# EAGLE board Copy of NTS Embarqué 3 (EAGLE 9.7.0)

Size 213.86 x 243.18 mm. Coordinates in mm from the lower left corner, seen from the top.
Outline: 0,0 213.86,0 213.86,243.19 0,243.19 0,0
Copper layers (1*16): Top 0.035mm / dielectric 1.5mm / Bottom 0.035mm
Design rules "default": minimum track width 6mil, minimum drill 0.35mm, track to track 6mil, track to pad 6mil, pad to pad 6mil, via to via 6mil, smd to smd 6mil, copper to edge 40mil, drill to drill 6mil, minimum pad ring 10mil, minimum via ring 8mil, stop-mask expansion 4mil, vias tented up to drill 0mil, thermal gap 10mil

## Footprints (pad centres in the part's own frame; a part is rotated, then mirrored left to right if it is on the bottom)
LEDRD254W60D565H860B_G = drill 0.981 pad 1.581: 1 -1.27,0; 2 1.27,0
7SEG-13 = drill 0.813 long: 1 -5.08,-7.62; 2 -2.54,-7.62; 3 0,-7.62; 4 2.54,-7.62; 5 5.08,-7.62; 6 5.08,7.62; 7 2.54,7.62; 8 0,7.62; 9 -2.54,7.62; 10 -5.08,7.62
1X08 = drill 1.016 long: 1 -8.89,0; 2 -6.35,0; 3 -3.81,0; 4 -1.27,0; 5 1.27,0; 6 3.81,0; 7 6.35,0; 8 8.89,0
RESAD1016W63L850D250B = drill 0.83 pad 1.43: 1 -5.08,0; 2 5.08,0
ARDUINO-UNO-R3-SHIELD = drill 1.016 pad 1.88: 3.3V 24.13,-2.54; 5V 24.13,0; A0 24.13,12.7; A1 24.13,15.24; A2 24.13,17.78; A3 24.13,20.32; A4 24.13,22.86; A5 24.13,25.4; AREF -24.13,-13.97; D2 -24.13,20.32; D3 -24.13,17.78; D4 -24.13,15.24; D5 -24.13,12.7; D6 -24.13,10.16; D7 -24.13,7.62; D8 -24.13,3.81; D9 -24.13,1.27; D10 -24.13,-1.27; D11 -24.13,-3.81; D12 -24.13,-6.35; D13 -24.13,-8.89; GND@0 24.13,2.54; GND@1 24.13,5.08; GND@2 -24.13,-11.43; IOREF 24.13,-7.62; NC 24.13,-10.16; RES 24.13,-5.08; RX -24.13,25.4; SCL -24.13,-19.05; SDA -24.13,-16.51; TX -24.13,22.86; VIN 24.13,7.62
DIP762W53P254L1969H508Q16B = drill 0.743 pad 1.343: 1 -3.81,8.89; 2 -3.81,6.35; 3 -3.81,3.81; 4 -3.81,1.27; 5 -3.81,-1.27; 6 -3.81,-3.81; 7 -3.81,-6.35; 8 -3.81,-8.89; 9 3.81,-8.89; 10 3.81,-6.35; 11 3.81,-3.81; 12 3.81,-1.27; 13 3.81,1.27; 14 3.81,3.81; 15 3.81,6.35; 16 3.81,8.89

## Placement (x,y rotation side)
D1  GREEN  [LEDRD254W60D565H860B_G]  142.37,221.51 180 top
DIGIT1  7SEG-CK  [7SEG-13]  31.88,218.97 0 top
DIGIT2  7SEG-CK  [7SEG-13]  62.36,218.97 0 top
DIGIT8  7SEG-CK  [7SEG-13]  92.84,218.97 0 top
DIGIT10  7SEG-CK  [7SEG-13]  123.32,218.97 0 top
KEYPAD1  KEYPAD-4X4  [1X08]  200.53,76.8 0 top
R1  100  [RESAD1016W63L850D250B]  31.88,234.21 90 top
R2  100  [RESAD1016W63L850D250B]  62.36,234.21 90 top
R3  220  [RESAD1016W63L850D250B]  141.1,234.21 90 top
R4  100  [RESAD1016W63L850D250B]  92.84,234.21 90 top
R5  100  [RESAD1016W63L850D250B]  123.32,234.21 90 top
U1  ARDUINO-UNO-R3-SHIELD  [ARDUINO-UNO-R3-SHIELD]  94.26,29.84 270 top
U2  CD4511_PDIP  [DIP762W53P254L1969H508Q16B]  15.4,158.47 90 top
U3  CD4511_PDIP  [DIP762W53P254L1969H508Q16B]  45.88,158.47 90 top
U4  CD4511_PDIP  [DIP762W53P254L1969H508Q16B]  76.36,158.47 90 top
U5  CD4511_PDIP  [DIP762W53P254L1969H508Q16B]  106.84,158.47 90 top
U6  74HC595_PDIP  [DIP762W53P254L1969H508Q16B]  30.4,101.59 270 top
U7  74HC595_PDIP  [DIP762W53P254L1969H508Q16B]  91.36,101.59 270 top

## Library data of the parts
D1 = Tinkercad; CATEGORY: Opto-Electronic; SUB-CATEGORY: LED; VALUE: LED_GREEN
DIGIT1 DIGIT2 DIGIT8 DIGIT10 = Tinkercad; CATEGORY: Opto-Electronic; SUB-CATEGORY: Display; TYPE: 7-Segment
KEYPAD1 R1-R5 U1-U7 = Tinkercad

## Nets
D1_C: D1.2 R3.1
DIGIT1_CK2: DIGIT1.8 R1.1
DIGIT2_CK2: DIGIT2.8 R2.1
DIGIT8_CK2: DIGIT8.8 R4.1
DIGIT10_CK2: DIGIT10.8 R5.1
U1_5V: U1.5V U2.3 U2.4 U2.16 U3.3 U3.4 U3.16 U4.3 U4.4 U4.16 U5.3 U5.4 U5.16 U6.16 U7.16
U1_D2: KEYPAD1.8 U1.D2
U1_D3: KEYPAD1.7 U1.D3
U1_D4: KEYPAD1.6 U1.D4
U1_D5: KEYPAD1.5 U1.D5
U1_D6: KEYPAD1.4 U1.D6
U1_D7: KEYPAD1.3 U1.D7
U1_D8: KEYPAD1.2 U1.D8
U1_D9: KEYPAD1.1 U1.D9
U1_D10: U1.D10 U7.14
U1_GND: R1.2 R2.2 R3.2 R4.2 R5.2 U1.GND@0 U1.GND@1 U1.GND@2 U2.5 U2.8 U3.5 U3.8 U4.5 U4.8 U5.5 U5.8 U6.8 U6.13 U7.8 U7.13
U2_A: DIGIT1.7 U2.13
U2_B: DIGIT1.6 U2.12
U2_C: DIGIT1.4 U2.11
U2_D: DIGIT1.2 U2.10
U2_E: DIGIT1.1 U2.9
U2_F: DIGIT1.9 U2.15
U2_G: DIGIT1.10 U2.14
U3_A: DIGIT2.7 U3.13
U3_B: DIGIT2.6 U3.12
U3_C: DIGIT2.4 U3.11
U3_D: DIGIT2.2 U3.10
U3_E: DIGIT2.1 U3.9
U3_F: DIGIT2.9 U3.15
U3_G: DIGIT2.10 U3.14
U4_A: DIGIT8.7 U4.13
U4_B: DIGIT8.6 U4.12
U4_C: DIGIT8.4 U4.11
U4_D: DIGIT8.2 U4.10
U4_E: DIGIT8.1 U4.9
U4_F: DIGIT8.9 U4.15
U4_G: DIGIT8.10 U4.14
U5_C: DIGIT10.4 U5.11
U5_D: DIGIT10.2 U5.10
U5_E: DIGIT10.1 U5.9
U5_G: DIGIT10.10 U5.14
U6_Q0: U3.7 U6.15
U6_Q1: U3.1 U6.1
U6_Q2: U3.2 U6.2
U6_Q3: U3.6 U6.3
U6_Q4: U2.7 U6.4
U6_Q5: U2.1 U6.5
U6_Q6: U2.2 U6.6
U6_Q7: U2.6 U6.7
U6_SRCLK: U6.11 U7.11
U7_Q0: U5.7 U7.15
U7_Q1: U5.1 U7.1
U7_Q2: U5.2 U7.2
U7_Q3: U5.6 U7.3
U7_Q4: U4.7 U7.4
U7_Q5: U4.1 U7.5
U7_Q6: U4.2 U7.6
U7_Q7: U4.6 U7.7
U7_Q7S: U6.14 U7.9
U7_RCLK: U6.12 U7.12

## Tracks (layer width: path | path; a pad name or v marks a point on that pad's centre or on a via)
D1_C  (1 unrouted)
DIGIT1_CK2  (1 unrouted)
DIGIT2_CK2  (1 unrouted)
DIGIT8_CK2  (1 unrouted)
DIGIT10_CK2  (1 unrouted)
U1_5V  (14 unrouted)
U1_D2  (1 unrouted)
U1_D3  (1 unrouted)
U1_D4  (1 unrouted)
U1_D5  (1 unrouted)
U1_D6  (1 unrouted)
U1_D7  (1 unrouted)
U1_D8  (1 unrouted)
U1_D9  (1 unrouted)
U1_D10  (1 unrouted)
U1_GND  (19 unrouted)
U2_A  (1 unrouted)
U2_B  (1 unrouted)
U2_C  (1 unrouted)
U2_D  (1 unrouted)
U2_E  (1 unrouted)
U2_F  (1 unrouted)
U2_G  (1 unrouted)
U3_A  (1 unrouted)
U3_B  (1 unrouted)
U3_C  (1 unrouted)
U3_D  (1 unrouted)
U3_E  (1 unrouted)
U3_F  (1 unrouted)
U3_G  (1 unrouted)
U4_A  (1 unrouted)
U4_B  (1 unrouted)
U4_C  (1 unrouted)
U4_D  (1 unrouted)
U4_E  (1 unrouted)
U4_F  (1 unrouted)
U4_G  (1 unrouted)
U5_C  (1 unrouted)
U5_D  (1 unrouted)
U5_E  (1 unrouted)
U5_G  (1 unrouted)
U6_Q0  (1 unrouted)
U6_Q1  (1 unrouted)
U6_Q2  (1 unrouted)
U6_Q3  (1 unrouted)
U6_Q4  (1 unrouted)
U6_Q5  (1 unrouted)
U6_Q6  (1 unrouted)
U6_Q7  (1 unrouted)
U6_SRCLK  (1 unrouted)
U7_Q0  (1 unrouted)
U7_Q1  (1 unrouted)
U7_Q2  (1 unrouted)
U7_Q3  (1 unrouted)
U7_Q4  (1 unrouted)
U7_Q5  (1 unrouted)
U7_Q6  (1 unrouted)
U7_Q7  (1 unrouted)
U7_Q7S  (1 unrouted)
U7_RCLK  (1 unrouted)